# Altium PCB 舵机控制_PCB1.PcbDoc
Units mm, origin at the board's own origin, x right, y up, seen from the top; angles counter-clockwise.
Board outline 60.25 x 55.3 mm, 2 copper layers (Top Layer, Bottom Layer); 83 components, 68 nets, 279 pads, 286 vias.
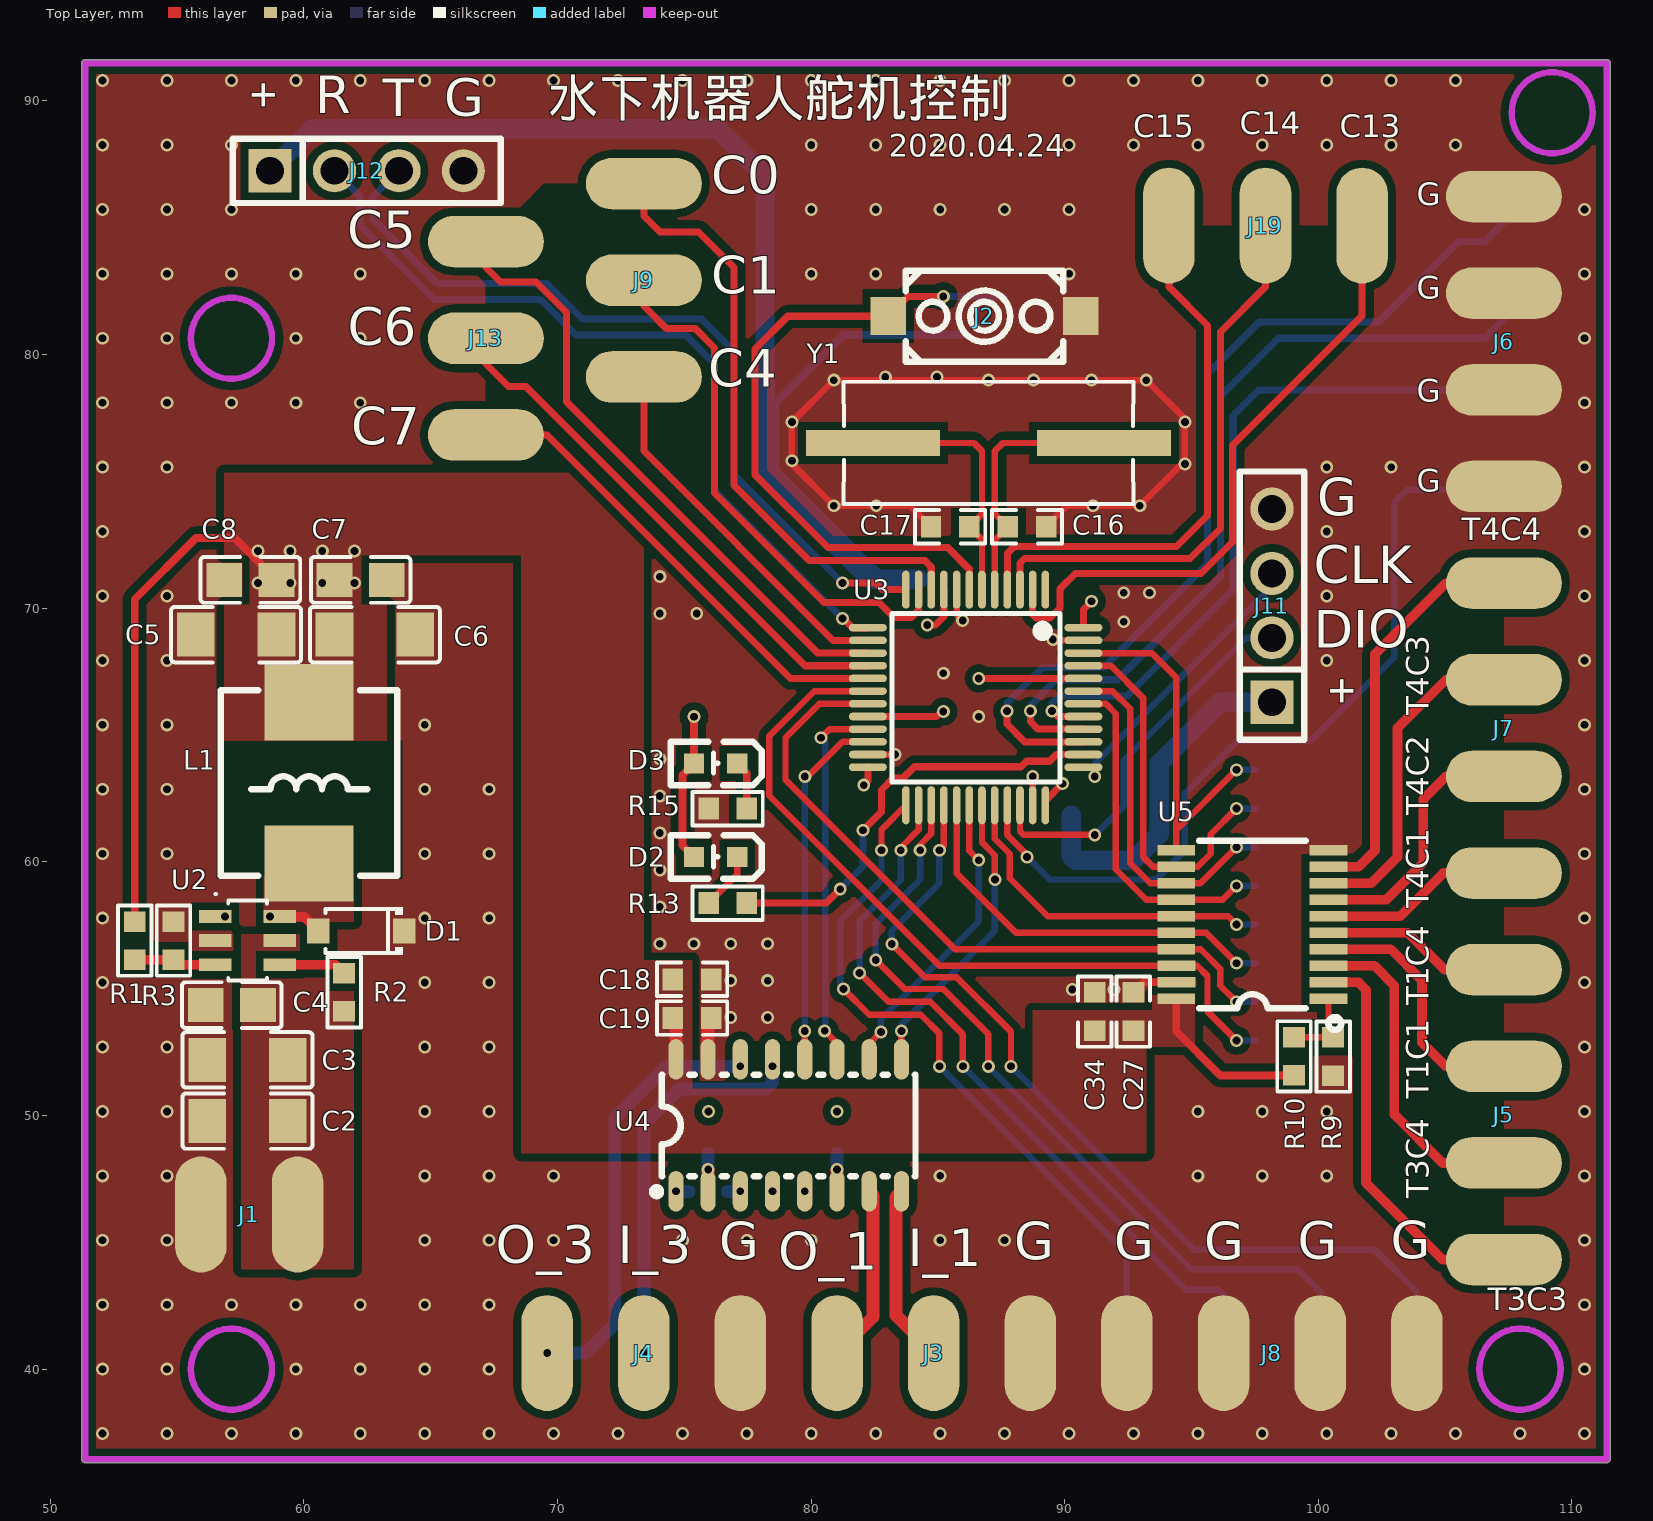
[diagram p0: Top Layer view]
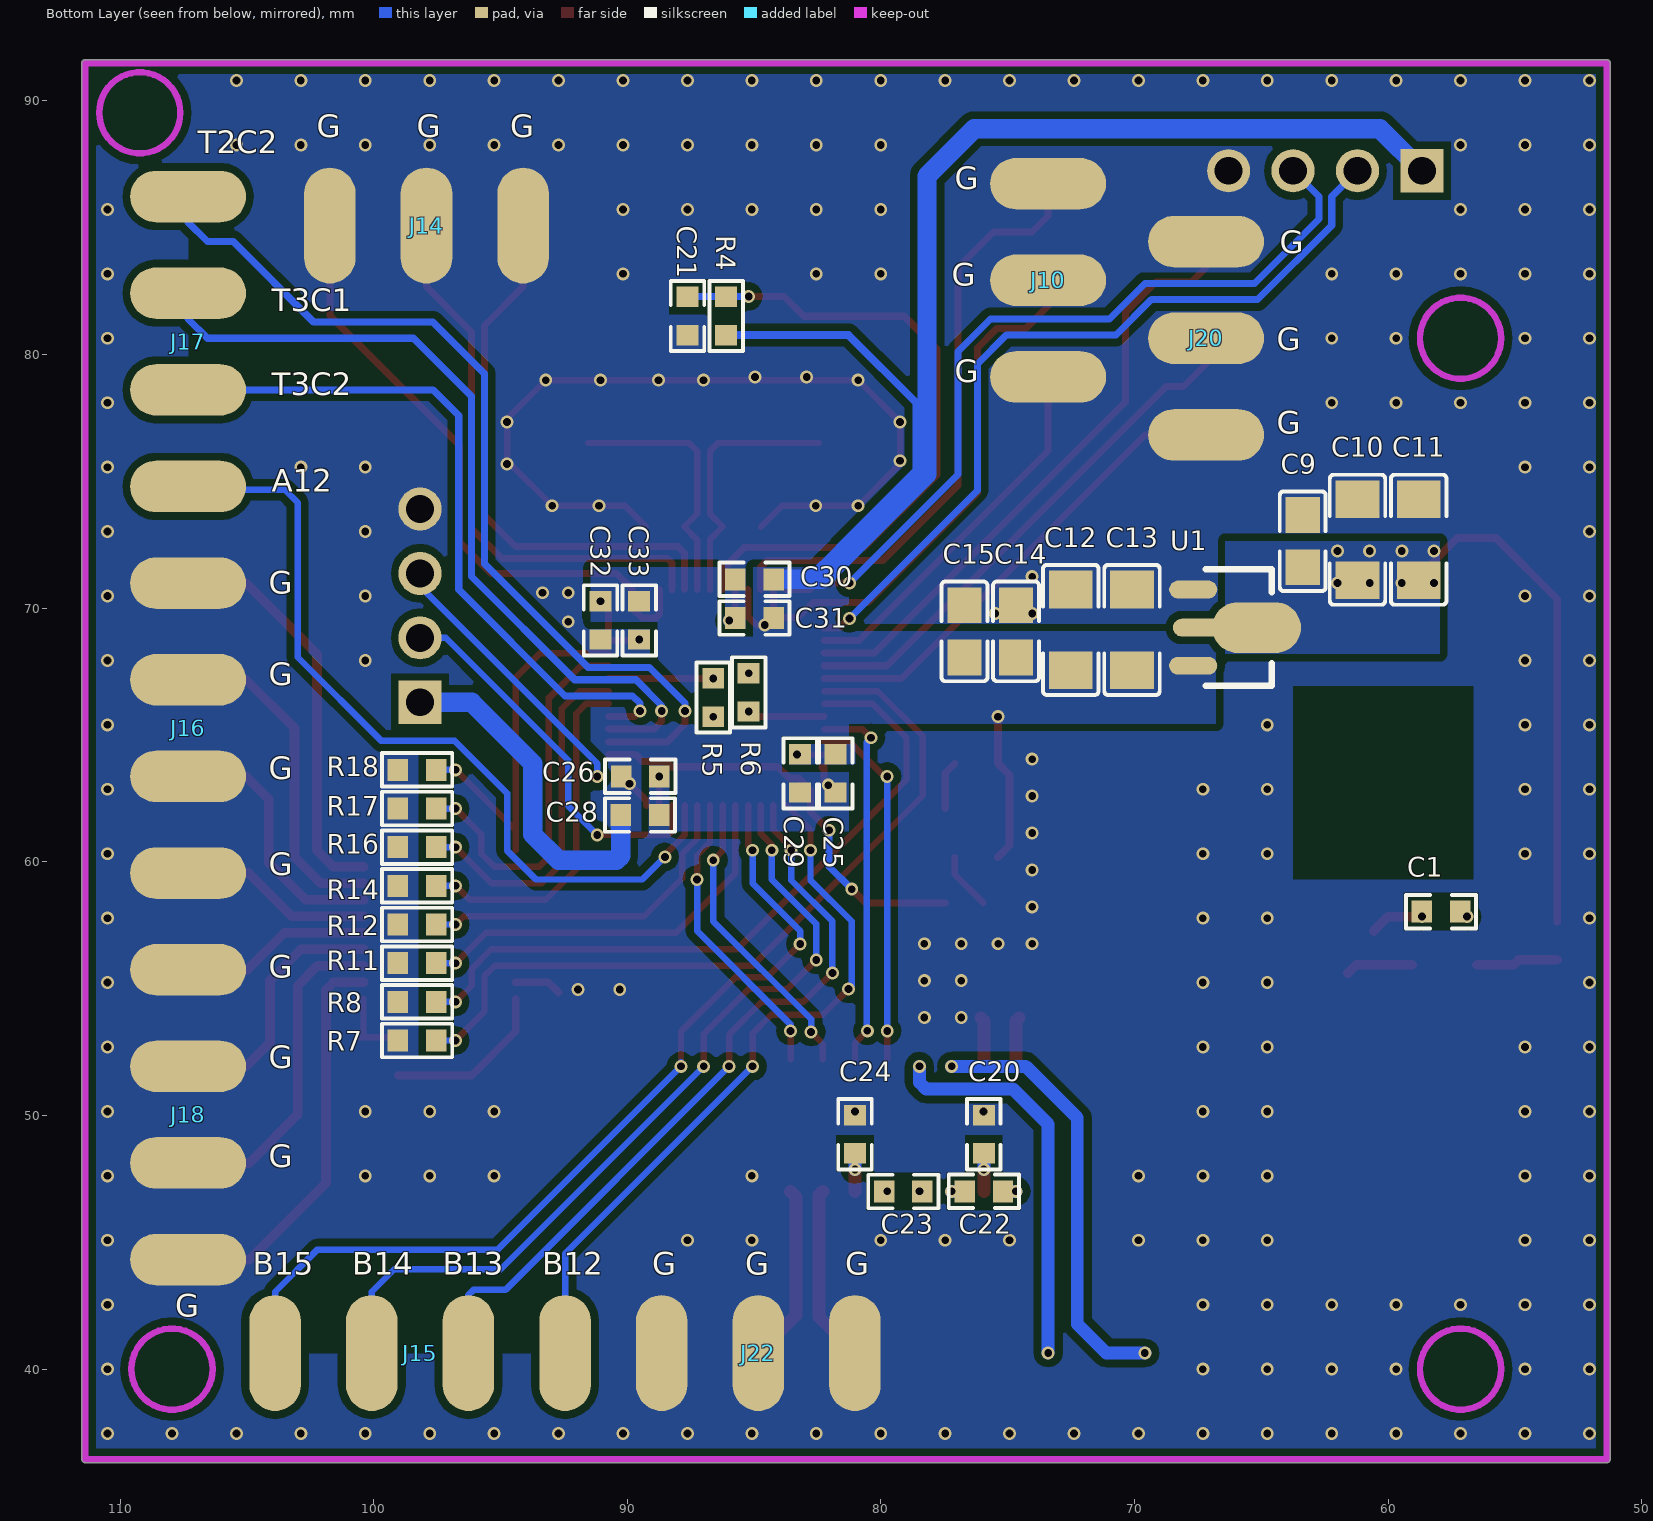
[diagram p1: Bottom Layer view, seen from below]

## Layer stack, top to bottom
Top Solder: solder mask 0.0102, Solder Resist, Dk 3.5
Top Layer: signal copper 0.0356
Dielectric 1: dielectric 0.32, FR-4, Dk 4.8
Bottom Layer: signal copper 0.0356
Bottom Solder: solder mask 0.0102, Solder Resist, Dk 3.5

## Board outline
51.254,36.473 cw(c51.379,36.496) 51.252,36.496 51.252,91.496 cw(c51.379,91.496) 51.379,91.623 111.379,91.623 cw(c111.379,91.496) 111.506,91.496 cw(c111.379,91.496) 111.504,91.472 cw(c111.379,91.449) 111.506,91.449 111.506,36.449 cw(c111.379,36.449) 111.379,36.322 51.379,36.322 cw(c51.379,36.449)

## Design rules (kind name [scope] priority, off if disabled: settings)
Clearance [All] p1: gap=0.305 ignorepadtopadclearanceinfootprint=TRUE except(0: Arc-Hole Track-Hole SMDPad-Hole THPad-Hole Via-Hole Fill-Hole Poly-Hole Region-Hole Text-Hole; 0.203: Arc-Arc Arc-Track Arc-SMDPad Arc-THPad Arc-Via Arc-Text Track-Track Track-SMDPad Track-THPad Track-Via Track-Text; 0.254: SMDPad-SMDPad SMDPad-THPad SMDPad-Via SMDPad-Text THPad-THPad THPad-Via THPad-Text Via-Via Via-Text Fill-Text Poly-Text Region-Text Text-Text)
PolygonConnect [All] p1: connectstyle=Direct reliefconductorwidth=0.254 reliefentries=4 polygonreliefangle="90 Angle" airgapwidth=0.254
RoutingVias [All] p1: holewidth=0.711 width=1.27 viastyle="Through Hole" minholewidth=0.711 minwidth=1.27 maxholewidth=0.711 maxwidth=1.27
SolderMaskExpansion [All] p1: expansion=0.102
Width [All] p1: maxlimit=2.54 minlimit=0.203 preferedwidth=0.254
30 further rules are at their usual default settings.

## Components (designator, comment, footprint, x,y, rotation, side; value= is the part's Value field where it differs from the comment)
C1 "104" 0603C 57.921,58.039 r180 bottom value=100pF
C2 "1206C" 1206C 57.784,49.784 r0 top
C3 "1206C" 1206C 57.784,52.197 r0 top
C4 "0805C" 0805C 57.164,54.356 r0 top
C5 "1206C" 1206C 57.335,68.961 r0 top
C6 "1206C" 1206C 62.807,68.961 r180 top
C7 "0805C" 0805C 62.244,71.12 r180 top
C8 "0805C" 0805C 57.898,71.12 r0 top
C9 "0805C" 0805C 63.373,72.644 r270 bottom
C10 "1206C" 1206C 61.214,72.702 r270 bottom
C11 "1206C" 1206C 58.801,72.702 r270 bottom
C12 "1206C" 1206C 72.517,69.146 r270 bottom
C13 "1206C" 1206C 70.104,69.146 r270 bottom
C14 "0805C" 0805C 74.676,69.088 r270 bottom
C15 "0805C" 0805C 76.708,69.088 r270 bottom
C16 "0603C" 0603C 88.513,73.215 r0 top value=100pF
C17 "0603C" 0603C 85.483,73.215 r180 top value=100pF
C18 "0603C" 0603C 75.311,55.372 r180 top value=100pF
C19 "0603C" 0603C 75.311,53.848 r180 top value=100pF
C20 "105" 0603C 75.946,49.267 r90 bottom value=100pF
C21 "0603C" 0603C 87.63,81.523 r90 bottom value=100pF
C22 "105" 0603C 75.943,47.014 r180 bottom value=100pF
C23 "105" 0603C 79.118,47.008 r180 bottom value=100pF
C24 "105" 0603C 81.026,49.267 r90 bottom value=100pF
C25 "0603C" 0603C 81.788,63.491 r270 bottom value=100pF
C26 "0603C" 0603C 89.493,63.373 r0 bottom value=100pF
C27 "0603C" 0603C 92.71,54.102 r270 top value=100pF
C28 "0603C" 0603C 89.502,61.849 r0 bottom value=100pF
C29 "0603C" 0603C 83.185,63.491 r270 bottom value=100pF
C30 "0603C" 0603C 84.986,71.139 r180 bottom value=100pF
C31 "0603C" 0603C 84.986,69.615 r180 bottom value=100pF
C32 "0603C" 0603C 91.059,69.524 r90 bottom value=100pF
C33 "0603C" 0603C 89.535,69.524 r90 bottom value=100pF
C34 "0603C" 0603C 91.186,54.102 r270 top value=100pF
D1 "Diode 1N914" SOD-123_L2.8-W1.8-LS3.7-RD 62.272,57.277 r180 top
D2 "LED" 0603LED 76.238,60.194 r180 top
D3 "LED" 0603LED 76.238,63.881 r180 top
J1 "Port2" PORT2 55.947,46.101 r0 top
J2 "SW2" KEY-SMD_L6.2-W3.6-LS8.0 86.838,81.515 r0 top
J3 "Port3" PORT3 81.026,40.64 r0 top
J4 "Port3" PORT3 69.599,40.64 r0 top
J5 "Port4" PORT4 107.315,44.323 r90 top
J6 "Port4" PORT4 107.315,74.803 r90 top
J7 "Port4" PORT4 107.315,59.563 r90 top
J8 "Port4" PORT4 92.456,40.64 r0 top
J9 "Port3" PORT3 73.409,86.741 r270 top
J10 "Port3" PORT3 73.409,86.741 r270 bottom
J11 "4PIN" 4PIN 98.171,70.104 r90 top
J12 "4PIN" 4PIN 62.484,87.249 r0 top
J13 "Port3" PORT3 67.183,84.455 r270 top
J14 "Port3" PORT3 94.107,85.09 r0 bottom
J15 "Port4" PORT4 92.456,40.64 r0 bottom
J16 "Port4" PORT4 107.315,70.993 r270 bottom
J17 "Port4" Port4 107.315,74.803 r90 bottom
J18 "Port4" Port4 107.315,55.753 r270 bottom
J19 "Port3" PORT3 101.727,85.09 r180 top
J20 "Port3" PORT3 67.183,84.455 r270 bottom
J22 "Port3" Port3 88.646,40.64 r180 bottom
L1 "10u" L-SMD-0630 60.212,63.119 r90 top
R1 "47k" 0603R 53.34,56.896 r90 top
R2 "1M" 0603R 61.595,54.864 r90 top
R3 "10k" 0603R 54.864,56.896 r270 top
R4 "0603R" 0603R 86.106,81.523 r90 bottom
R5 "0603R" 0603R 86.614,66.481 r90 bottom
R6 "0603R" 0603R 85.217,66.684 r270 bottom
R7 "0603R" 0603R 98.289,52.962 r0 bottom
R8 "0603R" 0603R 98.289,54.486 r0 bottom
R9 "10k" 0603R 100.584,52.327 r270 top
R10 "10k" 0603R 99.042,52.336 r270 top
R11 "0603R" 0603R 98.289,56.01 r0 bottom
R12 "0603R" 0603R 98.289,57.534 r0 bottom
R13 "0603R" 0603R 76.714,58.378 r0 top
R14 "0603R" 0603R 98.289,59.058 r0 bottom
R15 "0603R" 0603R 76.714,62.103 r180 top
R16 "0603R" 0603R 98.289,60.582 r0 bottom
R17 "0603R" 0603R 98.289,62.106 r0 bottom
R18 "0603R" 0603R 98.289,63.63 r0 bottom
U1 "HT7133" SOT-89-3_L4.5-W2.5-P1.50-LS4.2-BR 66.441,69.238 r0 bottom
U2 "TD1465" SOT-23-6 56.515,57.846 r0 top
U3 "STM32F103C8T6" LQFP-48_L7.0-W7.0-P0.50-LS9.0-BL 86.49,66.484 r180 top
U4 "RS232" SOP-16_L9.9-W3.9-P1.27-LS6.1-BL 79.118,49.614 r0 top
U5 "74HC245" TSSOP-20_L6.5-W4.4-P0.65-LS6.4-BL 97.4,57.534 r270 top
Y1 "XTAL" XTAL 86.998,76.517 r180 top

## Footprints (in the part's own frame and the unit in brackets; to place one, negate y for a bottom-side part, rotate by r counter-clockwise, add the part's x,y. Pads: shape width x height; smd on the part's side, far side on the other; paste and mask are expansions set on the pad)
4PIN [mm]
  rect 1.7x1.7 hole 1.1: 1(-3.81,0)
  round 1.7 hole 1.1: 2(-1.27,0) 3(1.27,0) 4(3.81,0)
  silkscreen extent -5.29,-1.27 5.29,1.27
0603C [mm]
  rect 0.806x0.864 smd: 1(-0.753,0) 2(0.753,0)
  silkscreen extent -1.39,-0.66 1.39,0.66
0603LED [mm]
  rect 0.8x0.8 smd: 1(0.851,0) 2(-0.851,0)
  silkscreen extent -1.82,-0.86 1.77,0.86
0603R [mm]
  rect 0.806x0.864 smd: 1(-0.753,0) 2(0.753,0)
  silkscreen extent -1.39,-0.66 1.39,0.66
0805C [mm]
  rect 1.41x1.35 smd: 1(-1.03,0) 2(1.03,0)
  silkscreen extent -1.96,-0.9 1.96,0.9
1206C [mm]
  rect 1.485x1.728 smd: 1(-1.593,0) 2(1.593,0)
  silkscreen extent -2.56,-1.09 2.56,1.09
KEY-SMD_L6.2-W3.6-LS8.0 [mm]
  rect 1.4x1.5 smd: 1(-3.8,0) 2(3.8,0)
  silkscreen extent -3.1,-1.8 3.1,1.8
L-SMD-0630 [mm]
  rect 3x3.5 smd: 1(-3.175,0) 2(3.175,0)
  silkscreen extent -3.66,-3.48 3.66,3.48
LQFP-48_L7.0-W7.0-P0.50-LS9.0-BL [mm]
  oval 0.3x1.5 smd: 1(-2.75,-4.25) 2(-2.25,-4.25) 3(-1.75,-4.25) 4(-1.25,-4.25) 5(-0.75,-4.25) 6(-0.25,-4.25) 7(0.25,-4.25) 8(0.75,-4.25) 9(1.25,-4.25) 10(1.75,-4.25) 11(2.25,-4.25) 12(2.75,-4.25) 25(2.75,4.25) 26(2.25,4.25) 27(1.75,4.25) 28(1.25,4.25) 29(0.75,4.25) 30(0.25,4.25) 31(-0.25,4.25) 32(-0.75,4.25) 33(-1.25,4.25) 34(-1.75,4.25) 35(-2.25,4.25) 36(-2.75,4.25)
  oval 1.5x0.3 smd: 13(4.25,-2.75) 14(4.25,-2.25) 15(4.25,-1.75) 16(4.25,-1.25) 17(4.25,-0.75) 18(4.25,-0.25) 19(4.25,0.25) 20(4.25,0.75) 21(4.25,1.25) 22(4.25,1.75) 23(4.25,2.25) 24(4.25,2.75) 37(-4.25,2.75) 38(-4.25,2.25) 39(-4.25,1.75) 40(-4.25,1.25) 41(-4.25,0.75) 42(-4.25,0.25) 43(-4.25,-0.25) 44(-4.25,-0.75) 45(-4.25,-1.25) 46(-4.25,-1.75) 47(-4.25,-2.25) 48(-4.25,-2.75)
  silkscreen extent -3.33,-3.31 3.3,3.34
PORT2 [mil]
  oval 80x180 smd: 1(0,0) 2(150,0)
PORT3 [mil]
  oval 80x180 smd: 1(0,0) 2(150,0) 3(300,0)
Port3 [mil]
  oval 80x180 smd: 1(0,0) 2(150,0) 3(300,0)
PORT4 [mil]
  oval 80x180 smd: 1(0,0) 2(150,0) 3(300,0) 4(450,0)
Port4 [mil]
  oval 80x180 smd: 1(0,0) 2(150,0) 3(300,0) 4(450,0)
SOD-123_L2.8-W1.8-LS3.7-RD [mm]
  rect 0.88x0.99 smd: 1(-1.693,0) 2(1.693,0)
  silkscreen extent -1.63,-0.94 1.41,0.94
SOP-16_L9.9-W3.9-P1.27-LS6.1-BL [mm]
  oval 0.6x1.598 smd: 1(-4.445,-2.6) 2(-3.175,-2.6) 3(-1.905,-2.6) 4(-0.635,-2.6) 5(0.635,-2.6) 6(1.905,-2.6) 7(3.175,-2.6) 8(4.445,-2.6) 9(4.445,2.6) 10(3.175,2.6) 11(1.905,2.6) 12(0.635,2.6) 13(-0.635,2.6) 14(-1.905,2.6) 15(-3.175,2.6) 16(-4.445,2.6)
  silkscreen extent -5.36,-2.76 5,2
SOT-23-6 [mil]
  rect 50x20 smd: 1(0,0) 2(0,-37.4) 3(0,-74.8) 4(100,-74.8) 5(100,-37.4) 6(100,0)
  silkscreen extent 0,-99 80,35
SOT-89-3_L4.5-W2.5-P1.50-LS4.2-BR [mm]
  oval 1.9x0.7 smd: 1(1.25,-1.501) 3(1.25,1.501)
  oval 2.1x0.7 smd: 2(1,0)
  oval 3.5x2 smd: 4(-1.25,0)
  silkscreen extent -1.85,-2.3 0.75,2.3
TSSOP-20_L6.5-W4.4-P0.65-LS6.4-BL [mm]
  rect 0.4x1.494 smd: 1(2.925,3.001) 2(2.275,3.001) 3(1.625,3.001) 4(0.975,3.001) 5(0.325,3.001) 6(-0.324,3.001) 7(-0.975,3.001) 8(-1.625,3.001) 9(-2.275,3.001) 10(-2.925,3.001) 11(-2.925,-3.001) 12(-2.275,-3.001) 13(-1.625,-3.001) 14(-0.975,-3.001) 15(-0.325,-3.001) 16(0.325,-3.001) 17(0.975,-3.001) 18(1.625,-2.996) 19(2.275,-2.996) 20(2.925,-3.001)
  silkscreen extent -3.3,-2.1 4.15,3.5
XTAL [mm]
  rect 5.274x1.02 smd: 1(4.553,0) 2(-4.553,0)
  silkscreen extent -5.71,-2.41 5.71,2.41

## Part data
C1 C20 C22 C23 C24: library part 0603C, LatestRevisionDate=17-Jul-2002, LatestRevisionNote="Re-released for DXP Platform.", PackageDescription="Radial Cap, Thru-Hole; 2 Leads; 0.3 in Pin Spacing", PackageReference=RAD-0.3, Published=8-Jun-2000, Publisher="Altium Limited"
L1: library part L, BOM_Manufacturer=cjiang, BOM_Manufacturer Part=FXL0630-100-M, BOM_Assembly Type=smtWeld, BOM_Paste Type=expand, BOM_Supplier=LCSC, BOM_Supplier Part=C167223, Contributor=LCSC, nameAlias=Inductance, spicePre=L, spiceSymbolName=FXL0630-100-M
R1 R2 R3 R9 R10: library part 0603R, LatestRevisionDate=17-Jul-2002, LatestRevisionNote="Re-released for DXP Platform.", PackageDescription="Axial Device, Thru-Hole; 2 Leads; 0.3 in Pin Spacing", PackageReference=AXIAL-0.3, Published=8-Jun-2000, Publisher="Altium Limited"
C16 C17 C18 C19 C21 C25 C26 C27 C28 C29 C30 C31 C32 C33 C34: LatestRevisionDate=17-Jul-2002, LatestRevisionNote="Re-released for DXP Platform.", PackageDescription="Radial Cap, Thru-Hole; 2 Leads; 0.3 in Pin Spacing", PackageReference=RAD-0.3, Published=8-Jun-2000, Publisher="Altium Limited"
D1: Code_JEDEC=DO-204-AH, ComponentLink1Description="Manufacturer Link", ComponentLink1URL=http://www.fairchildsemi.com/, ComponentLink2Description=Datasheet, ComponentLink2URL=http://www.fairchildsemi.com/ds/1N%2F1N4448.pdf, DatasheetVersion=1997, LatestRevisionDate=17-Jul-2002, LatestRevisionNote="Re-released for DXP Platform.", PackageDescription="Diode, Axial; Body 3.8 x 1.9 mm (LxDia. max), Lead Dia. 0.53 mm (max)", PackageReference=DO-35, Published=8-Jun-2000, Publisher="Altium Limited"
D2 D3: LatestRevisionDate=08-Jul-2005, LatestRevisionNote="Mech Layer 1 removed.", PackageDescription="LED; 2 Leads", PackageReference=LED-0, Published=8-Jun-2000, Publisher="Altium Limited"
J2: LatestRevisionDate=17-Jul-2002, LatestRevisionNote="Re-released for DXP Platform.", PackageDescription="Switch; 2 Leads", PackageReference=SPST-2, Published=24-Mar-1999, Publisher="Altium Limited"
R4 R5 R6 R7 R8 R11 R12 R13 R14 R15 R16 R17 R18: LatestRevisionDate=17-Jul-2002, LatestRevisionNote="Re-released for DXP Platform.", PackageDescription="Axial Device, Thru-Hole; 2 Leads; 0.3 in Pin Spacing", PackageReference=AXIAL-0.3, Published=8-Jun-2000, Publisher="Altium Limited"
U1: PCB DECAL=SOT-89-3_L4.5-W2.5-P1.50-LS4.2-BR
U2: PCB DECAL=SOT-23-6
U3: Comment_1=STM32F103C, PCB DECAL=LQFP-48_M
U4: PCB DECAL=SOP-16_L9.9-W3.9-P1.27-LS6.1-BL
U5: PCB DECAL=TSSOP-20_L6.5-W4.4-P0.65-LS6.4-BL

## Via types
v1: diameter 0.508, hole 0.305, Top Layer to Bottom Layer, 286 vias

## Nets (pads, with @x,y where several pads share a name; then routed paths per layer and width w, separated by ;. In a path a pad name is that pad's centre, name@x,y a point inside that pad or via, vN(x,y) a via of type N, cw(c..) or ccw(c..) an arc to the next point about the centre after c; other vN are vias at no path point)
232I_1: J3.2 U4.8 | length 7.1
  Top Layer w0.508: U4.8 83.347,46.798 83.347,42.129 J3.2
232I_3: J4.2 U4.13 | length 15.4
  Bottom Layer w0.508: v1(73.409,40.64) 73.409,49.654 73.406,49.657 74.803,51.054 78.232,51.054 78.486,51.308 78.483,51.311 v1(78.483,51.943)
232O_1: J3.1 U4.7 | length 7
  Top Layer w0.508: J3.1 82.445,42.059 82.445,46.863 U4.7
232O_3: J4.1 U4.14 | length 17.1
  Bottom Layer w0.508: v1@69.596,40.64 v1(69.599,40.64) 71.12,40.64 72.263,41.783 72.263,49.911 74.295,51.943 v1(77.213,51.943)
+3.3: C12.2 C13.2 C14.2 C15.2 C25.2 C26.2 C28.2 C29.2 C30.2 C31.2 C32.2 C33.2 D2.1 D3.1 J11.1 J12.1 R4.1 U1.3 U3.9 U3.24 U3.36 U3.48 | length 82.6
  Top Layer w0.279: v1(82.077,63.027) 82.24,63.19 U3.24 U3.24@82.315,63.735 ; v1(84.582,69.342) 84.905,69.342 85.24,69.676 U3.9 ; U3.36 89.24,62.41 v1(89.916,63.087) ; U3.48 90.74,69.958 v1(91.059,70.277)
  Top Layer w0.305: D2.1 74.93,60.651 74.93,63.424 D3.1 v1(75.387,65.728)
  Bottom Layer w0.305: 82.895,71.139 81.644,72.39 81.644,72.407 78.613,75.438 78.613,78.105 81.278,80.77 R4.1
  Bottom Layer w0.762: J12.1 60.325,88.9 76.327,88.9 78.182,87.045 78.182,75.291 82.334,71.139 82.895,71.139 C30.2 ; C28.2 90.255,60.24 90.424,60.071 92.71,60.071 93.726,61.087 93.726,63.881 96.139,66.294 J11.1
+5: C5.2 C6.2 C7.2 C8.2 C9.2 C10.2 C11.2 C18.2 C19.2 C27.2 C34.2 L1.2 R1.2 R10.2 U1.2 U1.4 U4.16 U5.20 | length 28.3
  Top Layer w0.305: R1.2 53.34,70.358 55.753,72.771 57.277,72.771 C8.2 ; U5.20 94.399,53.322 96.139,51.582 R10.2
  Top Layer w0.508: C19.2 74.673,53.733 U4.16
  other v1: 58.194,70.993 59.464,70.993 60.734,70.993 62.004,70.993 58.194,72.263 59.464,72.263 60.734,72.263 62.004,72.263
+24: C2.2 C3.2 C4.2 J1.2 R2.1 U2.5
ADC1_C0: J9.1 U3.10 | length 24.3
  Top Layer w0.279: J9.1 73.409,85.471 74.044,84.836 75.565,84.836 76.962,83.439 76.962,74.848 79.928,71.882 84.486,71.882 84.74,71.628 U3.10
ADC1_C1: J9.2 U3.11 | length 21.2
  Top Layer w0.279: J9.2 73.409,81.912 74.295,81.026 75.438,81.026 76.2,80.264 76.2,74.549 80.518,70.231 82.677,70.231 83.273,69.635 83.952,69.635 84.24,69.922 U3.11
ADC1_C4: J9.3 U3.14 | length 14.8
  Top Layer w0.279: J9.3 73.409,76.197 80.871,68.735 U3.14
ADC1_C5: J13.1 U3.15 | length 24.4
  Top Layer w0.279: J13.1 67.183,83.439 67.754,82.867 69.151,82.867 70.358,81.661 70.358,78.14 80.264,68.234 U3.15
ADC1_C6: J13.2 U3.16 | length 21
  Top Layer w0.279: J13.2 67.183,79.629 68.072,78.74 68.754,78.74 79.76,67.734 79.883,67.734 U3.16
ADC1_C7: J13.3 U3.17 | length 19
  Top Layer w0.279: J13.3 69.596,76.835 79.196,67.235 U3.17
CLK: J11.3 U3.37 | length 10.9
  Bottom Layer w0.254: v1(91.186,63.373) 91.186,63.881 98.171,70.866 J11.3
DIO: J11.2 U3.34 | length 15.3
  Top Layer w0.254: U3.34 88.24,61.211 88.386,61.065 v1(91.186,61.065)
  Bottom Layer w0.254: v1(91.186,61.065) 92.329,62.208 92.329,64.008 97.155,68.834 J11.2
GND: C2.1 C3.1 C4.1 C5.1 C6.1 C7.1 C8.1 C9.1 C10.1 C11.1 C12.1 C13.1 C14.1 C15.1 C16.2 C17.2 C18.1 C19.1 C20.2 C21.1 C24.2 C25.1 C26.1 C27.1 C28.1 C29.1 C30.1 C31.1 C32.1 C33.1 C34.1 D1.1 J1.1 J2.2 J3.3 J4.3 J6.1 J6.2 J6.3 J6.4 J8.1 J8.2 J8.3 J8.4 J10.1 J10.2 J10.3 J11.4 J12.4 J14.1 J14.2 J14.3 J16.1 J16.2 J16.3 J16.4 J18.1 J18.2 J18.3 J18.4 J20.1 J20.2 J20.3 J22.1 J22.2 J22.3 R3.1 R5.1 R6.1 R7.2 R8.2 R9.2 R11.2 R12.2 R14.2 R15.2 R16.2 R17.2 R18.2 U1.1 U2.2 U3.8 U3.23 U3.35 U3.47 U4.15 U5.10 U5.19 | length 41.5
  Top Layer w0.254: U3.23 v1(83.312,64.234) ; C17.2 83.904,74.041 v1(80.899,74.041) 79.248,75.692 v1(79.248,75.819) v1(79.248,77.343) v1(80.899,78.994) v1(93.218,78.994) 94.742,77.47 v1(94.742,77.343) v1(94.742,75.692) 94.615,75.692 v1(92.964,74.041) 90.092,74.041 C16.2 ; U3.8 85.74,69.756 v1(85.979,69.517) ; U3.35 v1(88.74,63.373) ; v1(89.535,68.77) 89.571,68.734 U3.47
  Top Layer w0.305: C27.1 93.114,55.259 U5.19
  Top Layer w0.508: U4.15 75.943,53.727 C19.1
  other v1: 52.07,37.465 54.61,37.465 57.15,37.465 59.69,37.465 62.23,37.465 64.77,37.465 67.31,37.465 69.85,37.465 72.39,37.465 74.93,37.465 77.47,37.465 80.01,37.465 82.55,37.465 85.09,37.465 87.63,37.465 90.17,37.465 92.71,37.465 95.25,37.465 97.79,37.465 100.33,37.465 102.87,37.465 105.41,37.465 107.95,37.465 110.49,37.465 52.07,40.005 54.61,40.005 59.69,40.005 62.23,40.005 64.77,40.005 67.31,40.005 110.49,40.005 52.07,42.545 54.61,42.545 57.15,42.545 59.69,42.545 62.23,42.545 64.77,42.545 67.31,42.545 110.49,42.545 52.07,45.085 54.61,45.085 64.77,45.085 67.31,45.085 69.85,45.085 74.93,45.085 77.47,45.085 80.01,45.085 85.09,45.085 87.63,45.085 110.49,45.085 52.07,47.625 54.61,47.625 64.77,47.625 67.31,47.625 69.85,47.625 85.09,47.625 95.25,47.625 97.79,47.625 100.33,47.625 110.49,47.625 52.07,50.165 54.61,50.165 64.77,50.165 67.31,50.165 75.961,50.165 81.026,50.165 95.25,50.165 97.79,50.165 100.33,50.165 110.49,50.165 52.07,52.705 54.61,52.705 64.77,52.705 67.31,52.705 110.49,52.705 76.835,53.864 78.291,53.864 90.297,54.974 91.948,54.974 52.07,55.245 64.77,55.245 67.31,55.245 110.49,55.245 76.835,55.319 78.291,55.319 74.041,56.775 75.379,56.775 76.835,56.775 78.291,56.775 52.07,57.785 64.77,57.785 67.31,57.785 110.49,57.785 74.041,58.231 74.041,59.687 52.07,60.325 54.61,60.325 64.77,60.325 67.31,60.325 110.49,60.325 74.041,61.142 74.041,62.598 52.07,62.865 54.61,62.865 64.77,62.865 67.31,62.865 110.49,62.865 74.041,64.054 52.07,65.405 54.61,65.405 64.77,65.405 110.49,65.405 86.614,65.728 85.217,67.437 52.07,67.945 54.61,67.945 100.33,67.945 110.49,67.945 92.329,69.469 74.041,69.791 75.497,69.791 52.07,70.485 54.61,70.485 100.33,70.485 110.49,70.485 92.329,70.612 93.345,70.612 74.041,71.247 52.07,73.025 100.33,73.025 110.49,73.025 82.573,74.041 91.12,74.041 52.07,75.565 54.61,75.565 100.33,75.565 102.87,75.565 110.49,75.565 52.07,78.105 54.61,78.105 57.15,78.105 59.69,78.105 62.23,78.105 110.49,78.105 86.995,78.994 88.769,78.994 91.059,78.994 82.931,79.121 84.963,79.121 52.07,80.645 54.61,80.645 59.69,80.645 62.23,80.645 110.49,80.645 52.07,83.185 54.61,83.185 57.15,83.185 59.69,83.185 62.23,83.185 80.01,83.185 82.55,83.185 90.17,83.185 110.49,83.185 52.07,85.725 54.61,85.725 57.15,85.725 80.01,85.725 82.55,85.725 85.09,85.725 87.63,85.725 90.17,85.725 110.49,85.725 52.07,88.265 54.61,88.265 57.15,88.265 80.01,88.265 82.55,88.265 85.09,88.265 87.63,88.265 90.17,88.265 92.71,88.265 95.25,88.265 97.79,88.265 100.33,88.265 102.87,88.265 105.41,88.265 52.07,90.805 54.61,90.805 57.15,90.805 59.69,90.805 62.23,90.805 64.77,90.805 67.31,90.805 69.85,90.805 72.39,90.805 74.93,90.805 77.47,90.805 80.01,90.805 82.55,90.805 85.09,90.805 87.63,90.805 90.17,90.805 92.71,90.805 95.25,90.805 97.79,90.805 100.33,90.805 102.87,90.805 105.41,90.805
LED: R13.2 U3.38 | length 17
  Top Layer w0.279: R13.2 80.603,58.378 v1(81.153,58.928) ; v1(82.047,61.25) 82.778,61.98 82.778,62.839 83.256,63.317 83.637,63.317 84.074,63.754 88.276,63.754 88.492,63.97 89.406,63.97 89.671,64.234 U3.38
  Bottom Layer w0.279: v1(81.153,58.928) 82.047,59.822 v1(82.047,61.25)
NetC1_1: C1.1 D1.2 L1.1 U2.6 | length 1.8
  Top Layer w0.381: U2.6 60.01,57.846 D1.2
  other v1: 58.674,57.846
NetC1_2: C1.2 U2.1
  other v1: 56.896,57.846
NetC16_1: C16.1 U3.5 Y1.2 | length 10.3
  Top Layer w0.254: U3.5 87.24,72.696 C16.1 87.249,73.726 87.249,76.2 87.566,76.517 Y1.2
NetC17_1: C17.1 U3.6 Y1.1 | length 10.3
  Top Layer w0.254: Y1.1 86.423,76.517 86.74,76.201 86.74,73.719 C17.1 86.74,72.712 U3.6
NetC20_1: C20.1 U4.2 | length 1.5
  Top Layer w0.508: U4.2 v1(75.943,47.879)
  Bottom Layer w0.508: v1(75.943,47.879) 75.943,48.511 C20.1
NetC21_2: C21.2 J2.1 R4.2 U3.7 | length 26.5
  Top Layer w0.279: v1(85.217,82.296) 83.82,82.296 J2.1 79.083,81.515 77.794,80.226 77.794,75.263 80.667,72.39 85.389,72.39 86.24,71.539 U3.7
  Bottom Layer w0.279: v1(85.217,82.296) 87.611,82.296 C21.2
NetC22_1: C22.1 U4.3 | length 0.5
  Bottom Layer w0.508: C22.1 v1(77.213,47.014)
NetC22_2: C22.2 U4.1 | length 0.5
  Bottom Layer w0.508: v1(74.673,47.014) C22.2
NetC23_1: C23.1 U4.5
  other v1: 79.753,47.014
NetC23_2: C23.2 U4.4
  other v1: 78.483,47.014
NetC24_1: C24.1 U4.6 | length 1.5
  Top Layer w0.508: U4.6 81.026,47.017 v1(81.026,47.879)
  Bottom Layer w0.508: v1(81.026,47.879) C24.1
NetD2_2: D2.2 R13.1 | length 2.3
  Top Layer w0.254: R13.1 77.089,59.507 D2.2
NetD3_2: D3.2 R15.1 | length 1.9
  Top Layer w0.279: D3.2 77.467,63.503 R15.1
NetR1_1: R1.1 R3.2 U2.3 | length 3.3
  Top Layer w0.381: R1.1 R3.2 55.061,55.946 U2.3
NetR2_2: R2.2 U2.4 | length 2.7
  Top Layer w0.381: U2.4 61.266,55.946 R2.2
NetR5_2: R5.2 U3.44 | length 4.1
  Top Layer w0.279: v1(86.614,67.234) U3.44
NetR6_2: R6.2 U3.20 | length 3.1
  Top Layer w0.279: U3.20 82.246,65.728 84.941,65.728 85.144,65.931 v1(85.217,65.931)
NetR9_1: R9.1 R10.1 U5.1 | length 3.1
  Top Layer w0.254: R10.1 100.575,53.089 100.401,53.263 U5.1
PA12: J17.1 U3.33 | length 33
  Top Layer w0.254: U3.33 87.74,61.065 88.606,60.198 v1(88.519,60.198)
  Bottom Layer w0.254: v1(88.519,60.198) 89.408,59.309 93.599,59.309 94.742,60.452 94.742,62.71 96.802,64.77 99.695,64.77 102.997,68.072 102.997,74.168 103.505,74.676 107.188,74.676 J17.1
PB12: J15.1 U3.25 | length 28.5
  Top Layer w0.254: v1(81.28,54.991) 82.296,53.975 84.328,53.975 85.064,53.239 v1(85.064,51.943) ; v1(82.778,60.46) 82.778,61.273 U3.25
  Bottom Layer w0.254: v1(81.28,54.991) 81.153,55.118 81.153,57.658 82.778,59.283 v1(82.778,60.46) ; v1(85.064,51.943) 92.456,44.551 J15.1
PB13: J15.2 U3.26 | length 30.2
  Top Layer w0.254: v1(81.915,55.626) 83.055,54.486 84.699,54.486 85.99,53.195 v1(85.99,51.943) ; v1(83.54,60.46) 83.54,60.564 84.24,61.264 U3.26
  Bottom Layer w0.254: v1(81.915,55.626) 81.915,57.658 83.54,59.283 v1(83.54,60.46) ; v1(85.99,51.943) 94.806,43.127 96.065,43.127 96.266,42.926 J15.2
PB14: J15.3 U3.27 | length 31.2
  Top Layer w0.254: v1(82.55,56.134) 83.693,54.991 85.213,54.991 86.99,53.215 v1(86.99,51.943) ; v1(84.302,60.46) 84.302,60.68 84.74,61.118 U3.27
  Bottom Layer w0.254: v1(82.55,56.134) 82.55,57.557 84.302,59.309 v1(84.302,60.46) ; v1(86.99,51.943) 94.991,43.942 99.187,43.942 100.076,43.053 J15.3@100.076,42.545
PB15: J15.4 U3.28 | length 36.1
  Top Layer w0.254: v1(83.185,56.769) 84.506,55.448 85.749,55.448 87.884,53.313 v1(87.884,51.943) ; v1(85.064,60.46) 85.24,60.636 U3.28
  Bottom Layer w0.254: v1(83.185,56.769) 83.185,57.277 85.064,59.156 v1(85.064,60.46) ; v1@87.884,52.097 v1(87.884,51.943) 95.123,44.704 102.235,44.704 103.886,43.053 J15.4
PC13: J19.1 U3.2 | length 25.2
  Top Layer w0.279: U3.2 88.74,69.756 88.881,69.615 89.427,69.615 89.808,69.996 89.808,70.758 90.424,71.374 95.377,71.374 96.622,72.619 96.622,76.429 101.727,81.534 J19.1
PC14: J19.2 U3.3 | length 22.2
  Top Layer w0.279: U3.3 88.24,71.78 88.417,71.958 94.945,71.958 96.139,73.152 96.139,80.899 97.917,82.677 J19.2
PC15: J19.3 U3.4 | length 22
  Top Layer w0.279: U3.4 87.74,72.169 88.011,72.441 94.412,72.441 95.631,73.66 95.631,81.153 94.107,82.677 J19.3
RX1: U3.31 U4.9 | length 11.8
  Top Layer w0.254: U4.9 v1(83.563,53.337) ; U3.31 86.74,60.772 87.249,60.262 v1(87.249,59.309)
  Bottom Layer w0.254: v1(83.563,53.337) 83.563,53.591 87.249,57.277 v1(87.249,59.309)
RX2: J12.2 U3.13 | length 32
  Top Layer w0.279: v1@81.28,69.596 81.641,69.235 U3.13
  Bottom Layer w0.279: J12.2 62.23,86.233 62.23,85.09 65.151,82.169 69.342,82.169 70.741,80.77 75.059,80.77 76.2,79.629 76.2,74.641 v1(81.245,69.596)
RX3: U3.22 U4.12 | length 14.1
  Top Layer w0.254: U4.12 v1(79.753,53.337) ; v1(79.756,63.373) 79.883,63.373 81.245,64.735 U3.22
  Bottom Layer w0.254: v1@79.753,53.467 79.753,63.37 v1(79.756,63.373)
T1C1: R11.1 U3.29 U5.16 | length 15.9
  Top Layer w0.254: U3.29 85.74,59.548 88.079,57.209 U5.16 95.575,57.209 v1(96.774,56.01)
  Bottom Layer w0.254: v1(96.774,56.01) R11.1
T1C1_O: J5.3 U5.4 | length 10.3
  Top Layer w0.381: U5.4 102.855,56.559 104.089,55.325 104.089,52.883 105.029,51.943 J5.3
T1C4: R12.1 U3.32 U5.15 | length 13.6
  Top Layer w0.254: U3.32 87.24,60.918 87.833,60.325 87.833,59.36 89.334,57.859 U5.15 96.449,57.859 v1(96.774,57.534)
  Bottom Layer w0.254: v1(96.774,57.534) R12.1
T1C4_O: J5.4 U5.5 | length 7.5
  Top Layer w0.381: U5.5 103.512,57.209 104.968,55.753 J5.4
T2C2: J17.4 U3.39 | length 36.9
  Top Layer w0.279: v1@87.729,65.851 87.729,65.433 88.428,64.734 U3.39
  Bottom Layer w0.279: v1(87.729,65.951) 87.729,66.266 89.129,67.666 91.542,67.666 95.631,71.755 95.631,79.248 97.663,81.28 102.362,81.28 105.537,84.455 106.553,84.455 107.315,85.217 J17.4
T3C1: J17.3 U3.40 | length 33
  Top Layer w0.279: v1@88.646,65.913 88.646,65.532 88.944,65.234 U3.40
  Bottom Layer w0.279: v1(88.646,65.951) 88.646,66.167 89.662,67.183 92.075,67.183 96.139,71.247 96.139,78.359 98.425,80.645 106.553,80.645 107.315,81.407 J17.3
T3C2: J17.2 U3.41 | length 28.6
  Top Layer w0.279: v1(89.497,65.951) 89.714,65.734 U3.41
  Bottom Layer w0.279: v1(89.497,65.951) 89.497,66.256 89.645,66.404 89.65,66.404 89.693,66.446 89.794,66.548 92.456,66.548 96.647,70.739 96.647,77.597 97.663,78.613 J17.2
T3C3: R7.1 U3.18 U5.18 | length 31
  Top Layer w0.254: U3.18 80.129,66.735 78.359,64.965 78.359,62.614 85.064,55.909 U5.18 95.224,55.909 95.631,55.502 95.631,54.105 v1(96.774,52.962)
  Bottom Layer w0.254: v1(96.774,52.962) R7.1
T3C3_O: J5.1 U5.2 | length 15.9
  Top Layer w0.381: U5.2 101.6,55.259 101.6,55.237 101.878,54.959 101.878,47.347 104.902,44.323 J5.1
T3C4: R8.1 U3.19 U5.17 | length 28
  Top Layer w0.254: U3.19 80.332,66.235 78.994,64.897 78.994,63.244 85.679,56.559 U5.17 95.362,56.559 96.139,55.782 96.139,55.121 v1(96.774,54.486)
  Bottom Layer w0.254: v1(96.774,54.486) R8.1
T3C4_O: J5.2 U5.3 | length 13.1
  Top Layer w0.381: U5.3 102.206,55.909 102.997,55.118 102.997,50.038 104.902,48.133 J5.2
T4C1: R14.1 U3.42 U5.14 | length 13.8
  Top Layer w0.254: U3.42 91.627,66.234 92.015,65.846 92.015,59.714 93.221,58.509 U5.14 96.225,58.509 v1(96.774,59.058)
  Bottom Layer w0.254: v1(96.774,59.058) R14.1
T4C1_O: J7.1 U5.6 | length 7.6
  Top Layer w0.381: U5.6 103.22,57.857 104.925,59.563 J7.1
T4C2: R16.1 U3.43 U5.13 | length 14.1
  Top Layer w0.254: U3.43 91.889,66.734 92.583,66.04 92.583,59.944 93.368,59.159 U5.13 95.351,59.159 v1(96.774,60.582)
  Bottom Layer w0.254: v1(96.774,60.582) R16.1
T4C2_O: J7.2 U5.7 | length 10.4
  Top Layer w0.381: U5.7 102.673,58.509 104.14,59.975 104.14,62.484 105.029,63.373 J7.2
T4C3: R17.1 U3.45 U5.12 | length 15.1
  Top Layer w0.254: U3.45 91.823,67.734 93.091,66.466 93.091,60.198 93.48,59.809 U5.12 95.239,59.809 95.758,60.328 95.758,61.09 v1(96.774,62.106)
  Bottom Layer w0.254: v1(96.774,62.106) R17.1
T4C3_O: J7.3 U5.8 | length 13.2
  Top Layer w0.381: U5.8 102.085,59.159 103.124,60.198 103.124,65.278 105.029,67.183 J7.3
T4C4: R18.1 U3.46 U5.11 | length 15
  Top Layer w0.254: U3.46 93.437,68.234 94.399,67.272 94.399,61.255 ; U5.11 94.399,61.255 ; v1(96.774,63.63) 94.399,61.255
  Bottom Layer w0.254: v1(96.774,63.63) R18.1
T4C4_O: J7.4 U5.9 | length 16.1
  Top Layer w0.381: U5.9 101.583,59.809 102.235,60.46 102.235,68.199 105.029,70.993 J7.4
TX1: U3.30 U4.10 | length 12
  Top Layer w0.254: U4.10 82.293,52.837 v1(82.754,53.299) ; U3.30 86.24,60.445 v1(86.614,60.071)
  Bottom Layer w0.254: v1(82.754,53.299) 82.754,53.796 86.614,57.655 v1(86.614,60.071)
TX2: J12.3 U3.12 | length 32.2
  Top Layer w0.279: v1(81.245,70.993) 82.55,70.993 82.809,70.734 U3.12
  Bottom Layer w0.279: J12.3 62.738,86.233 62.738,85.344 65.278,82.804 69.596,82.804 70.993,81.407 75.68,81.407 76.962,80.125 76.962,75.276 v1(81.245,70.993)
TX3: U3.21 U4.11 | length 15
  Top Layer w0.254: v1(80.391,64.897) 80.729,65.235 U3.21 ; v1(80.538,53.34) 81.023,52.854 U4.11
  Bottom Layer w0.254: v1(80.391,64.897) 80.569,64.719 80.569,53.34 v1(80.538,53.34)
pads on no net: U3.1

## Polygon pours and split planes (outlines as drawn)
GND on Top Layer "Top Layer-GND" (solid, remove dead copper, pour order 40): 51.254,91.623 111.506,91.623 111.506,36.322 51.254,36.322
+5 on Top Layer "Top Layer-+5" (solid, pour order 32): 68.58,72.39 68.58,55.946 73.406,55.946 73.406,72.39
+5 on Top Layer "Top Layer-+5 1" (solid, pour order 30): 93.091,54.855 93.091,52.705 95.123,52.705 95.123,54.855
+5 on Top Layer "Top Layer-+5 2" (solid, pour order 28): 93.218,48.514 93.218,54.147 88.74,54.147 88.74,48.514
+5 on Top Layer "Top Layer-+5 3" (solid, pour order 26): 72.77,48.514 93.218,48.514 93.218,51.054 72.77,51.054
+5 on Top Layer "Top Layer-+5 4" (solid, pour order 22): 68.58,56.134 68.58,48.514 75.311,48.514 75.311,56.134
+5 on Top Layer "Top Layer-+5 5" (solid, pour order 20): 73.4,75.344 62.992,75.344 62.992,72.1 73.4,72.1
+5 on Top Layer "Top Layer-+5 6" (solid, pour order 10): 63.274,64.77 63.274,75.344 56.868,75.344 56.868,64.77
no net on Top Layer "Top Layer-No Net" (solid, pour order 8): 58.194,66.802
NetC1_1 on Top Layer "Top Layer-NetC1_1" (solid, pour order 6): 59.69,57.649 61.976,57.649 61.976,59.436 58.42,59.436 58.42,57.649
+24 on Top Layer "Top Layer-+24" (solid, pour order 2): 61.976,43.942 61.976,57.159 57.531,57.159 57.531,43.942
GND on Bottom Layer "Bottom Layer-GND" (solid, remove dead copper, pour order 42): 51.254,91.623 111.506,91.623 111.506,36.322 51.254,36.322
+3.3 on Bottom Layer "Bottom Layer-+3.3" (solid, pour order 38): 81.28,71.614 81.28,61.214 91.44,61.214 91.44,71.614
+3.3 on Bottom Layer "Bottom Layer-+3.3 1" (solid, pour order 18): 84.709,69.088 66.802,69.088 66.802,65.457 84.709,65.457
+5 on Bottom Layer "Bottom Layer-+5" (solid, pour order 12): 66.421,72.644 57.971,72.644 57.972,68.199 66.421,68.199

## Keep-outs
Keep-Out Layer:
  circle w0.254: c57.15,80.645 r1.6
  circle w0.254: c57.15,40.005 r1.6
  circle w0.254: c107.95,40.005 r1.6
  circle w0.254: c109.22,89.535 r1.6
  lines w0.254: 51.379,36.449 111.379,36.449 111.379,91.449 ; 51.379,36.496 51.379,91.496 111.379,91.496

## Other copper
Top Layer:
  pour cut-out: 67.183,84.455 69.469,86.741 73.409,86.741 73.409,79.121 71.123,76.835 67.183,76.835
  pour cut-out: 94.107,85.09 101.727,85.09 101.727,81.534 101.346,81.153 95.631,81.153 94.107,82.677
  pour cut-out: 107.315,70.993 107.315,44.323 104.902,44.323 102.235,46.99 102.235,68.199 105.029,70.993
  pour cut-out: 61.595,59.338 61.595,64.77 63.881,64.77 63.881,59.338
  pour cut-out: 56.557,59.338 56.557,61.849 58.42,61.849 58.42,59.338
  pour cut-out: 56.557,64.643 63.754,64.643 63.754,61.749 56.557,61.749
Bottom Layer:
  pour cut-out: 92.456,40.64 103.886,40.64 102.235,42.291 102.235,44.704 95.123,44.704 94.97,44.551 92.456,44.551
  pour cut-out: 107.315,86.233 107.315,78.613 97.663,78.613 97.663,81.28 102.362,81.28
  pour cut-out: 107.315,86.233
  pour cut-out: 56.642,66.929 63.754,66.929 63.754,59.309 56.642,59.309

## Silkscreen, mask and mechanical layers (free items; w line width, h text height)
Top Overlay:
  text "＋" at 57.404,89.027 h2.54
  text "R" at 60.452,89.027 h2.54
  text "T" at 63.119,88.9 h2.54
  text "G" at 65.532,88.9 h2.54
  text "水下机器人舵机控制" at 69.599,88.9 h2.54
  text "C14" at 96.901,88.392 h1.52
  text "C15" at 92.71,88.265 h1.52
  text "C13" at 100.838,88.265 h1.52
  text "2020.04.24" at 83.058,87.503 h1.52
  text "C0" at 76.073,85.852 h2.54
  text "G" at 103.886,85.598 h1.52
  text "C5" at 61.722,83.693 h2.54
  text "C1" at 76.073,81.915 h2.54
  text "G" at 103.886,81.915 h1.52
  text "C6" at 61.736,79.883 h2.54
  text "C4" at 75.943,78.232 h2.54
  text "G" at 103.886,77.851 h1.52
  text "C7" at 61.88,75.946 h2.54
  text "G" at 103.886,74.295 h1.52
  text "G" at 99.949,73.152 h2.54
  text "T4C4" at 105.664,72.39 h1.52
  text "CLK" at 99.822,70.485 h2.54
  text "DIO" at 99.822,67.945 h2.54
  text "T4C3" at 104.648,65.786 h1.52 r90
  text "＋" at 99.923,65.532 h2.54
  text "T4C2" at 104.648,61.849 h1.52 r90
  text "T4C1" at 104.648,58.166 h1.52 r90
  text "T1C4" at 104.648,54.356 h1.52 r90
  text "T1C1" at 104.648,50.673 h1.52 r90
  text "T3C4" at 104.648,46.736 h1.52 r90
  text "G" at 102.855,43.856 h2.54
  text "G" at 99.187,43.835 h2.54
  text "G" at 76.384,43.823 h2.54
  text "G" at 88.011,43.815 h2.54
  text "G" at 91.948,43.815 h2.54
  text "G" at 95.504,43.815 h2.54
  text "O_3" at 67.564,43.688 h2.54
  text "I_3" at 72.39,43.688 h2.54
  text "I_1" at 83.82,43.561 h2.54
  text "O_1" at 78.714,43.434 h2.54
  text "T3C3" at 106.68,42.037 h1.52
Bottom Overlay:
  text "G" at 94.615,88.265 h1.52
  text "G" at 98.298,88.265 h1.52
  text "G" at 102.235,88.265 h1.52
  text "T2C2" at 106.934,87.649 h1.52
  text "G" at 77.089,86.233 h1.52
  text "G" at 64.277,83.693 h1.52
  text "G" at 77.216,82.423 h1.52
  text "T3C1" at 104.013,81.407 h1.52
  text "G" at 64.389,79.883 h1.52
  text "G" at 77.089,78.613 h1.52
  text "T3C2" at 104.013,78.105 h1.52
  text "G" at 64.389,76.581 h1.52
  text "A12" at 104.013,74.295 h1.52
  text "G" at 104.14,70.277 h1.52
  text "G" at 104.14,66.675 h1.52
  text "G" at 104.14,62.969 h1.52
  text "G" at 104.14,59.182 h1.52
  text "G" at 104.14,55.146 h1.52
  text "G" at 104.14,51.562 h1.52
  text "G" at 104.14,47.668 h1.52
  text "G" at 81.407,43.434 h1.52
  text "G" at 85.344,43.434 h1.52
  text "G" at 89.027,43.434 h1.52
  text "B12" at 93.345,43.434 h1.52
  text "B13" at 97.282,43.434 h1.52
  text "B14" at 100.838,43.434 h1.52
  text "B15" at 104.775,43.434 h1.52
  text "G" at 107.823,41.783 h1.52
Mechanical 1:
  circle w0.254: c109.22,89.535 r1.6
  circle w0.254: c107.95,40.005 r1.6
  circle w0.254: c57.15,40.005 r1.6
  circle w0.254: c57.15,80.645 r1.6
  lines w0.254: 51.379,36.449 111.379,36.449 111.379,91.449 ; 51.379,36.496 51.379,91.496 111.379,91.496